# Altium PCB Glove_End.PcbDoc
Units mm, origin at the board's own origin, x right, y up, seen from the top; angles counter-clockwise.
Board outline 50.1 x 61.38 mm, 2 copper layers (Top Layer, Bottom Layer); 63 components, 108 nets, 559 pads, 133 vias.
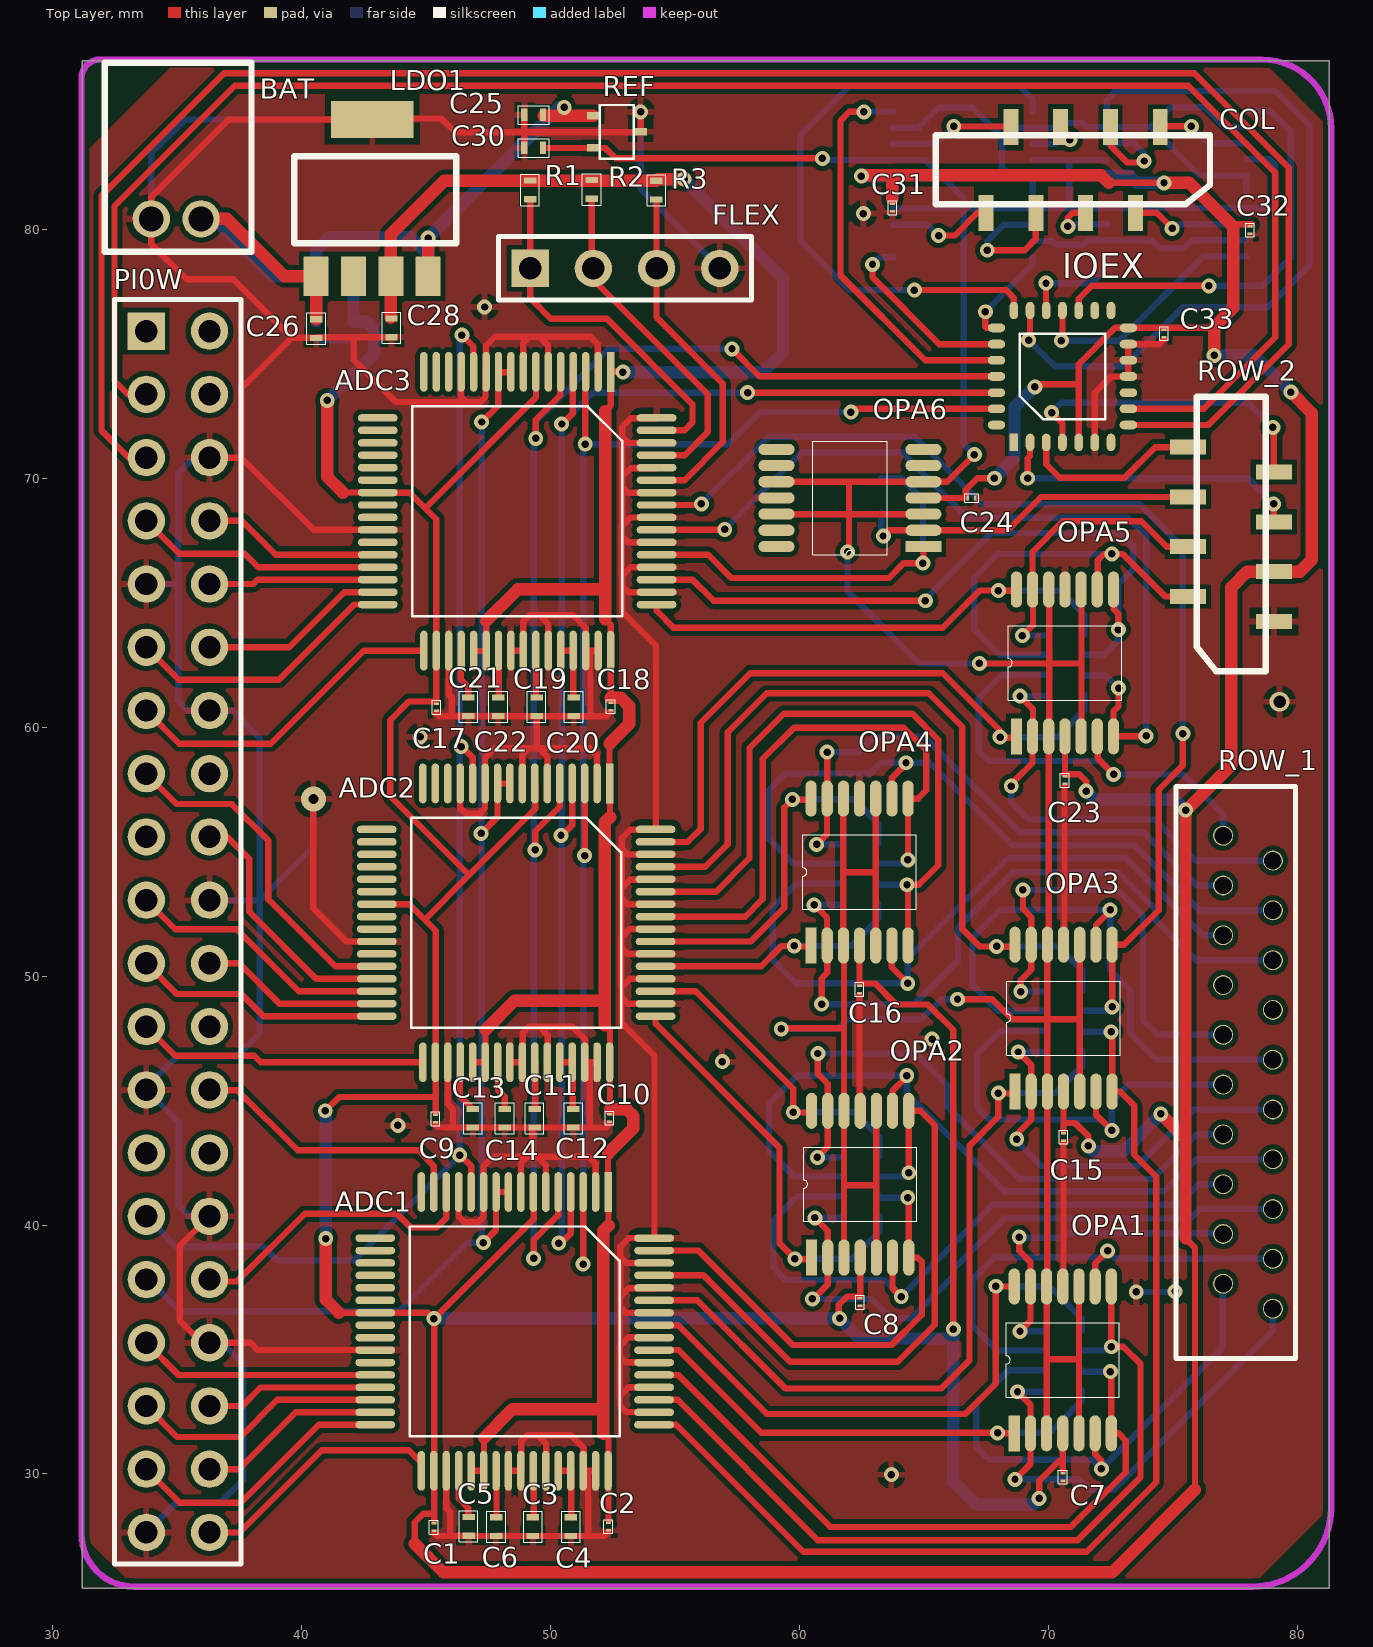
[diagram p0: Top Layer view]
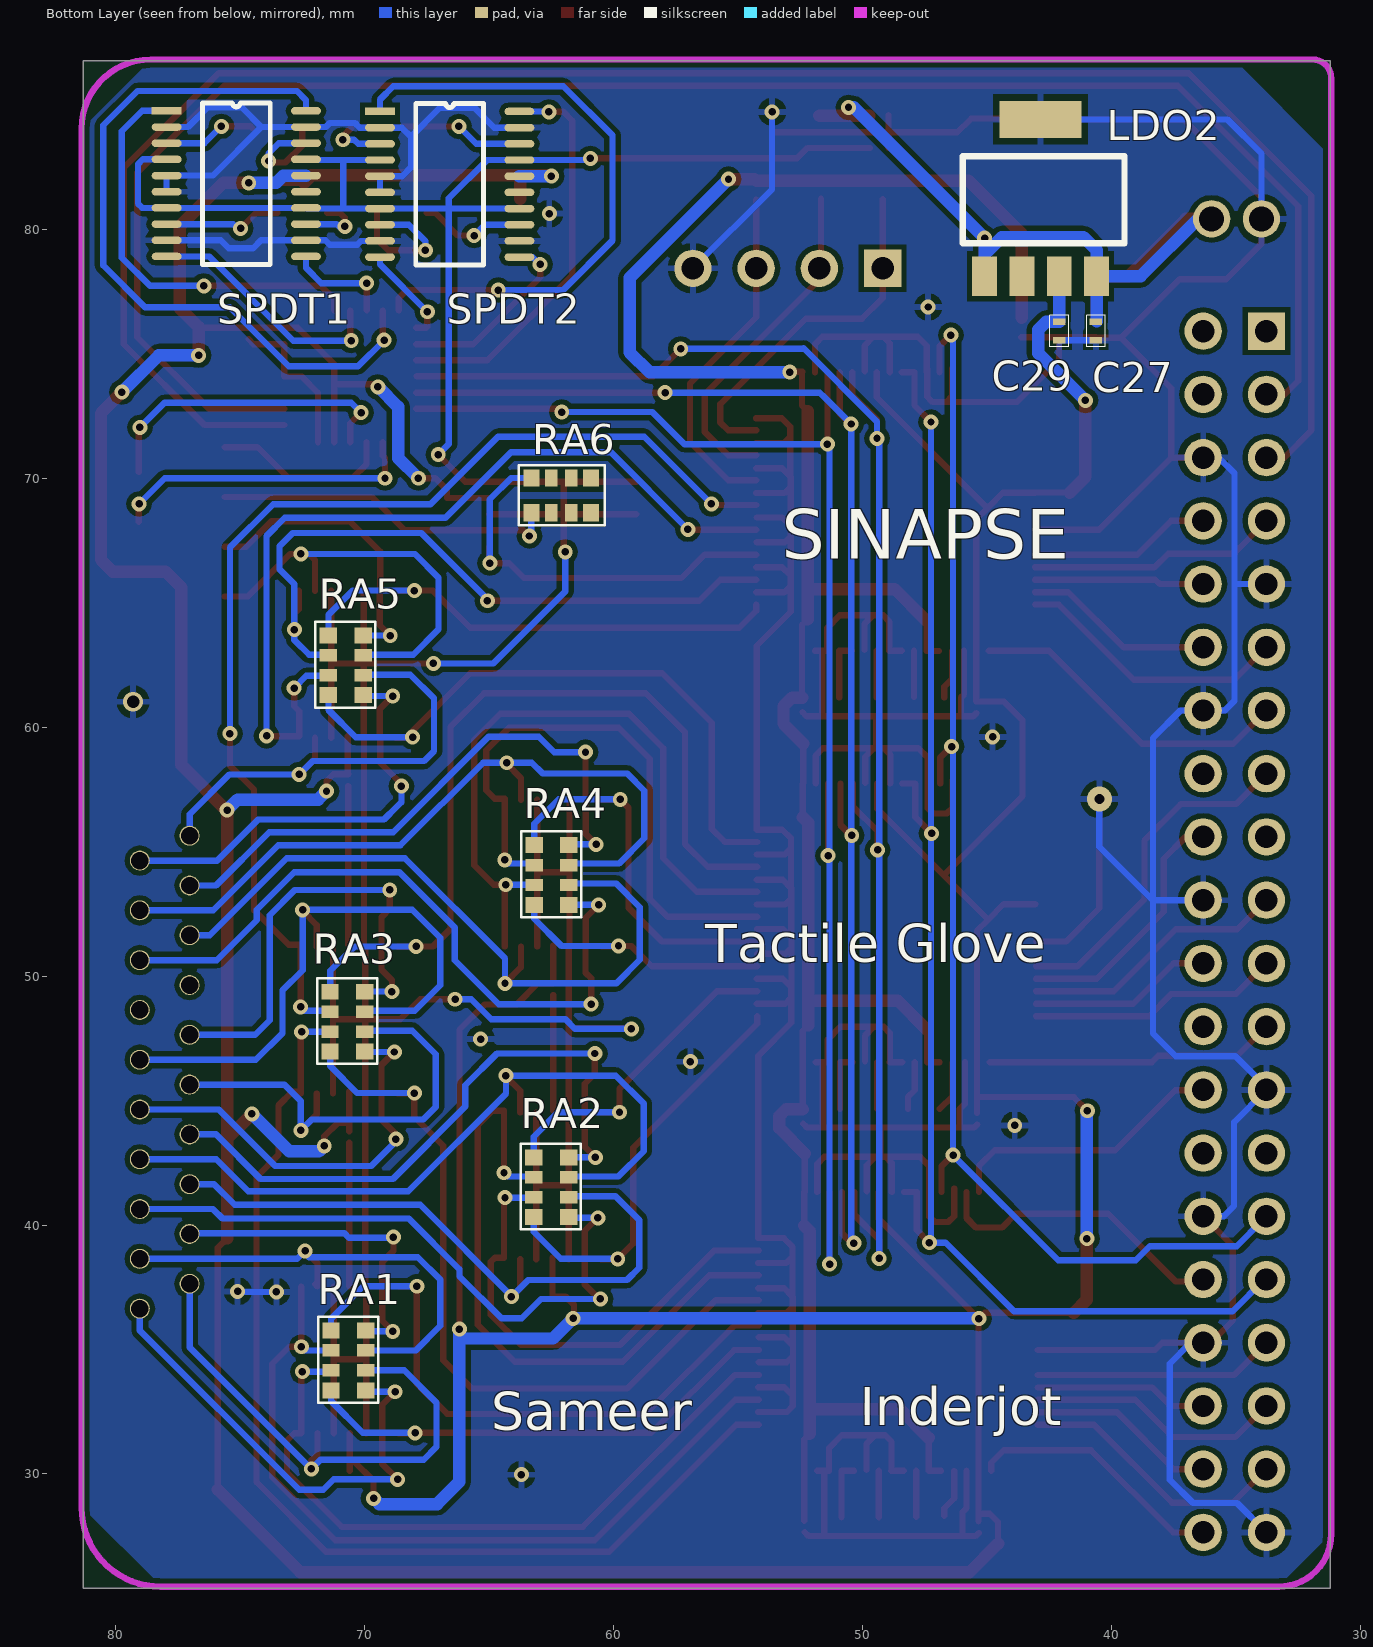
[diagram p1: Bottom Layer view, seen from below]

## Layer stack, top to bottom
Top Solder: solder mask 0.0102, Solder Resist, Dk 3.5
Top Layer: signal copper 0.0356
Dielectric 1: dielectric 0.32, FR-4, Dk 4.8
Bottom Layer: signal copper 0.0356
Bottom Solder: solder mask 0.0102, Solder Resist, Dk 3.5

## Board outline
31.19,25.4 81.29,25.4 81.29,86.78 31.19,86.78

## Design rules (kind name [scope] priority, off if disabled: settings)
Clearance [All] p1: gap=0.2 except(0.1: SMDPad-THPad SMDPad-SMDPad THPad-THPad)
HoleSize [All] p1: absolutevalues=TRUE maxlimit=5 minlimit=0.3 maxpercent=80.000 minpercent=20.000
HoleToHoleClearance [All] p1: gap=0.2 allowstackedmicrovias=TRUE
MinimumSolderMaskSliver [All] p1: minsoldermaskwidth=0.1
PolygonConnect [All] p1: connectstyle=Relief reliefconductorwidth=0.254 reliefentries=4 polygonreliefangle="90 Angle" airgapwidth=0.254
RoutingVias [All] p1: holewidth=0.3 width=0.6 viastyle="Through Hole" minholewidth=0.3 minwidth=0.6 maxholewidth=1 maxwidth=2
SilkToSilkClearance [All] p1: silktosilkclearance=0
SilkToSolderMaskClearance [IsPad] p1: minsilkscreentomaskgap=0 clearancetoexposedcopper=TRUE
SolderMaskExpansion [All] p1: expansion=0.05
UnpouredPolygon [All] p1: allowunpoured=FALSE
Width [All] p1: maxlimit=0.6 minlimit=0.2 preferedwidth=0.2
24 further rules are at their usual default settings.

## Components (designator, comment, footprint, x,y, rotation, side; value= is the part's Value field where it differs from the comment)
ADC1 "ADS8588s" LQFP64 52.31,41.325 r270 top
ADC2 "ADS8588s" LQFP64 52.37,57.74 r270 top
ADC3 "ADS8588s" LQFP64 52.41,74.275 r270 top
BAT "Battery" JST_CONN_2POS 33.96,80.42 r0 top (schematic designator HEADER1)
C1 "Cap" 0402 45.31,27.86 r270 top
C2 "Cap" 0402 52.32,27.89 r270 top
C3 "Cap" 1005 49.29,27.88 r90 top
C4 "Cap" 1005 50.82,27.88 r270 top
C5 "Cap" 1005 46.71,27.89 r270 top
C6 "Cap" 1005 47.82,27.88 r270 top
C7 "Cap" 0402 70.58,29.88 r90 top
C8 "Cap" 0402 62.43,36.9 r90 top
C9 "Cap" 0402 45.38,44.27 r270 top
C10 "Cap" 0402 52.37,44.3 r270 top
C11 "Cap" 1005 49.36,44.29 r90 top
C12 "Cap" 1005 50.92,44.29 r270 top
C13 "Cap" 1005 46.88,44.29 r270 top
C14 "Cap" 1005 48.16,44.29 r270 top
C15 "Cap" 0402 70.61,43.54 r90 top
C16 "Cap" 0402 62.41,49.47 r90 top
C17 "Cap" 0402 45.42,60.8 r270 top
C18 "Cap" 0402 52.42,60.83 r270 top
C19 "Cap" 1005 49.44,60.82 r90 top
C20 "Cap" 1005 50.93,60.82 r270 top
C21 "Cap" 1005 46.7,60.82 r270 top
C22 "Cap" 1005 47.9,60.82 r270 top
C23 "Cap" 0402 70.66,57.87 r90 top
C24 "Cap" 0402 66.92,69.21 r180 top
C25 "Cap" 1005 49.32,84.595 r0 top
C26 "Cap" 1005 40.585,76.015 r90 top
C27 "Cap" 1005 40.61,75.915 r90 bottom
C28 "Cap" 1005 43.61,76.04 r90 top
C29 "Cap" 1005 42.085,75.915 r90 bottom
C30 "Cap" 1005 49.32,83.27 r0 top
C31 "Cap" 0402 63.735,80.87 r90 top
C32 "Cap" 0402 78.095,79.97 r90 top
C33 "Cap" 0402 74.65,75.81 r90 top
COL "FFC_8POS" FFC_SMD_8_1 74.495,84.11 r180 top (schematic designator COL_CON1)
FLEX "HEADER4x1" HDR1X4 49.179,78.435 r0 top (schematic designator FLEX_CON1)
IOEX "MCP23017" QFN28 68.615,71.44 r90 top (schematic designator IOEX1)
LDO1 "LP38693-5" SOT-223(5) 40.585,78.115 r0 top
LDO2 "LP38693-3.3" SOT-223(5) 45.085,78.115 r180 bottom
OPA1 "OPA4354" TSSOP14 68.63,31.63 r90 top
OPA2 "OPA4354" TSSOP14 60.49,38.69 r90 top
OPA3 "OPA4354" TSSOP14 68.66,45.36 r90 top
OPA4 "OPA4354" TSSOP14 60.465,51.23 r90 top
OPA5 "OPA4354" TSSOP14 68.715,59.63 r90 top
OPA6 "OPA4354" TSSOP14 64.98,67.26 r180 top
PI0W "Header 20X2" HDR2X20 33.76,75.91 r270 top (schematic designator PI_CONN1)
R1 "Res3" 1005 49.18,81.582 r270 top
R2 "Res3" 1005 51.655,81.602 r270 top
R3 "Res3" 1005 54.255,81.577 r270 top
RA1 "RES_ARR_4" 4x0603(0612) 69.94,33.36 r90 bottom
RA2 "RES_ARR_4" 4x0603(0612) 61.79,40.32 r90 bottom
RA3 "RES_ARR_4" 4x0603(0612) 69.98,46.97 r90 bottom
RA4 "RES_ARR_4" 4x0603(0612) 61.78,52.86 r90 bottom
RA5 "RES_ARR_4" 4x0603(0612) 70.05,61.29 r90 bottom
RA6 "RES_ARR_4" 4x0603(0612) 63.29,68.61 r180 bottom
REF "REF3312-1.2V" SC70(3) 51.72,84.57 r270 top (schematic designator REF1)
ROW_1 "FFC_20POS" FFC_THT_20_1 79.02,36.64 r90 top (schematic designator ROW_CON1)
ROW_2 "FFC_8POS" FFC_SMD_8_1 79.06,64.25 r90 top (schematic designator ROW_CON2)
SPDT1 "ADG734" TSSOP20 77.945,84.76 r180 bottom
SPDT2 "ADG734" TSSOP20 69.37,84.735 r180 bottom

## Footprints (in the part's own frame and the unit in brackets; to place one, negate y for a bottom-side part, rotate by r counter-clockwise, add the part's x,y. Pads: shape width x height; smd on the part's side, far side on the other; paste and mask are expansions set on the pad)
4x0603(0612) [mm]
  rect 0.64x0.7 smd mask+0.05: 1(0,0) 4(2.4,0) 5(2.4,1.4) 8(0,1.4)
  rect 0.5x0.7 smd mask+0.05: 2(0.8,0) 3(1.6,0) 6(1.6,1.4) 7(0.8,1.4)
  silkscreen extent -0.5,-0.49 2.95,1.92
0402 [mm]
  rect 0.1x0.2 smd mask+0.05: 1(-0.15,0) 2(0.15,0)
  silkscreen extent -0.28,-0.18 0.28,0.18
1005 [mm]
  rect 0.25x0.5 smd: 1(-0.375,0) 2(0.375,0)
  silkscreen extent -0.63,-0.38 0.63,0.38
FFC_SMD_8_1 [mm]
  rect 0.6x1.45 smd: 1(0,0) 2(1,3.45) 3(2,0) 4(3,3.45) 5(4,0) 6(5,3.45) 7(6,0) 8(7,3.45)
  silkscreen extent -2,0.33 9.03,3.1
FFC_THT_20_1 [mm]
  round 0.8 hole 0.7 mask+0.2: 1(0,0) 2(1,2) 3(2,0) 4(3,2) 5(4,0) 6(5,2) 7(6,0) 8(7,2) 9(8,0) 10(9,2) 11(10,0) 12(11,2) 13(12,0) 14(13,2) 15(14,0) 16(15,2) 17(16,0) 18(17,2) 19(18,0) 20(19,2)
  silkscreen extent -2,-0.9 20.98,3.9
HDR1X4 [mm] "Connector; Header; 4 Position"
  rect 1.5x1.5 hole 0.9: 1(0,0)
  round 1.5 hole 0.9: 2(2.54,0) 3(5.08,0) 4(7.62,0)
  silkscreen extent -1.27,-1.27 8.89,1.27
HDR2X20 [mm] "Connector; Header; 20x2 Position"
  rect 1.5x1.5 hole 0.9: 1(0,0)
  round 1.5 hole 0.9: 2(0,2.54) 3(2.54,0) 4(2.54,2.54) 5(5.08,0) 6(5.08,2.54) 7(7.62,0) 8(7.62,2.54) 9(10.16,0) 10(10.16,2.54) 11(12.7,0) 12(12.7,2.54) 13(15.24,0) 14(15.24,2.54) 15(17.78,0) 16(17.78,2.54) 17(20.32,0) 18(20.32,2.54) 19(22.86,0) 20(22.86,2.54) 21(25.4,0) 22(25.4,2.54) 23(27.94,0) 24(27.94,2.54) 25(30.48,0) 26(30.48,2.54) 27(33.02,0) 28(33.02,2.54) 29(35.56,0) 30(35.56,2.54) 31(38.1,0) 32(38.1,2.54) 33(40.64,0) 34(40.64,2.54) 35(43.18,0) 36(43.18,2.54) 37(45.72,0) 38(45.72,2.54) 39(48.26,0) 40(48.26,2.54)
  silkscreen extent -1.27,-1.27 49.53,3.81
JST_CONN_2POS [mm]
  round 1.5 hole 1: 1(0,0) 2(2,0)
  silkscreen extent -1.88,-1.33 4.02,6.27
LQFP64 [mm]
  rect 1.6x0.3 smd mask+0.05: 1(0,0)
  oval 1.6x0.3 smd mask+0.05: 2(0,-0.5) 3(0,-1) 4(0,-1.5) 5(0,-2) 6(0,-2.5) 7(0,-3) 8(0,-3.5) 9(0,-4) 10(0,-4.5) 11(0,-5) 12(0,-5.5) 13(0,-6) 14(0,-6.5) 15(0,-7) 16(0,-7.5) 33(11.2,-7.5) 34(11.2,-7) 35(11.2,-6.5) 36(11.2,-6) 37(11.2,-5.5) 38(11.2,-5) 39(11.2,-4.5) 40(11.2,-4) 41(11.2,-3.5) 42(11.2,-3) 43(11.2,-2.5) 44(11.2,-2) 45(11.2,-1.5) 46(11.2,-1) 47(11.2,-0.5) 48(11.2,0)
  oval 0.3x1.6 smd mask+0.05: 17(1.85,-9.35) 18(2.35,-9.35) 19(2.85,-9.35) 20(3.35,-9.35) 21(3.85,-9.35) 22(4.35,-9.35) 23(4.85,-9.35) 24(5.35,-9.35) 25(5.85,-9.35) 26(6.35,-9.35) 27(6.85,-9.35) 28(7.35,-9.35) 29(7.85,-9.35) 30(8.35,-9.35) 31(8.85,-9.35) 32(9.35,-9.35) 49(9.35,1.85) 50(8.85,1.85) 51(8.35,1.85) 52(7.85,1.85) 53(7.35,1.85) 54(6.85,1.85) 55(6.35,1.85) 56(5.85,1.85) 57(5.35,1.85) 58(4.85,1.85) 59(4.35,1.85) 60(3.85,1.85) 61(3.35,1.85) 62(2.85,1.85) 63(2.35,1.85) 64(1.85,1.85)
  silkscreen extent 1.38,-7.96 9.81,0.47
QFN28 [mm]
  rect 0.7x0.35 smd mask+0.05: 1(0,0)
  oval 0.7x0.35 smd mask+0.05: 2(0,-0.65) 3(0,-1.3) 4(0,-1.95) 5(0,-2.6) 6(0,-3.25) 7(0,-3.9) 15(5.3,-3.9) 16(5.3,-3.25) 17(5.3,-2.6) 18(5.3,-1.95) 19(5.3,-1.3) 20(5.3,-0.65) 21(5.3,0)
  oval 0.35x0.7 smd mask+0.05: 8(0.7,-4.6) 9(1.35,-4.6) 10(2,-4.6) 11(2.65,-4.6) 12(3.3,-4.6) 13(3.95,-4.6) 14(4.6,-4.6) 22(4.6,0.7) 23(3.95,0.7) 24(3.3,0.7) 25(2.65,0.7) 26(2,0.7) 27(1.35,0.7) 28(0.7,0.7)
  silkscreen extent 0.93,-3.67 4.37,-0.23
SC70(3) [mm]
  rect 0.3x0.5 smd mask+0.1: 1(0,0) 2(1.3,0) 3(0.65,1.9)
  silkscreen extent -0.42,0.25 1.73,1.62
SOT-223(5) [mm]
  rect 1x1.6 smd: 1(0,0) 2(1.5,0) 3(3,0) 4(4.5,0)
  rect 3.3x1.5 smd: 5(2.25,6.3)
  silkscreen extent -0.87,1.33 5.63,4.83
TSSOP14 [mm]
  rect 1.45x0.45 smd mask+0.05: 1(0,0)
  oval 1.45x0.45 smd mask+0.05: 2(0,-0.65) 3(0,-1.3) 4(0,-1.95) 5(0,-2.6) 6(0,-3.25) 7(0,-3.9) 8(5.9,-3.9) 9(5.9,-3.25) 10(5.9,-2.6) 11(5.9,-1.95) 12(5.9,-1.3) 13(5.9,-0.65) 14(5.9,0)
  silkscreen extent 1.46,-4.23 4.44,0.33
TSSOP20 [mm]
  rect 1.2x0.3 smd: 1(0,0)
  oval 1.2x0.3 smd: 2(0,-0.65) 3(0,-1.3) 4(0,-1.95) 5(0,-2.6) 6(0,-3.25) 7(0,-3.9) 8(0,-4.55) 9(0,-5.2) 10(0,-5.85) 11(5.6,-5.85) 12(5.6,-5.2) 13(5.6,-4.55) 14(5.6,-3.9) 15(5.6,-3.25) 16(5.6,-2.6) 17(5.6,-1.95) 18(5.6,-1.3) 19(5.6,-0.65) 20(5.6,0)
  silkscreen extent 1.43,-6.18 4.17,0.33

## Part data
BAT: library part "Header 2", "Header, 2-Pin"
C1 C2 C3 C4 C5 C6 C7 C8 C9 C10 C11 C12 C13 C14 C15 C16 C17 C18 C19 C20 C21 C22 C23 C24 C25 C26 C27 C28 C29 C30 C31 C32 C33: "Capacitor"
COL ROW_2: library part FFC_8POPS
FLEX: library part "Header 4", "Header, 4-Pin"
LDO1 LDO2: library part LP38693
PI0W: "Header, 20-Pin, Dual row"
R1 R2 R3: "Resistor"
REF: library part REF3312

## Via types
v1: diameter 0.6, hole 0.3, Top Layer to Bottom Layer, 131 vias
v2: diameter 0.8, hole 0.5, Top Layer to Bottom Layer, 1 vias
v3: diameter 1, hole 0.4, Top Layer to Bottom Layer, 1 vias

## Nets (pads, with @x,y where several pads share a name; then routed paths per layer and width w, separated by ;. In a path a pad name is that pad's centre, name@x,y a point inside that pad or via, vN(x,y) a via of type N, cw(c..) or ccw(c..) an arc to the next point about the centre after c; other vN are vias at no path point)
3V3: ADC1.7 ADC1.23 ADC1.34 ADC2.7 ADC2.23 ADC2.34 ADC3.7 ADC3.23 ADC3.34 C1.1 C7.2 C8.2 C9.1 C15.2 C16.2 C17.1 C23.2 C24.2 C29.2 C31.2 C32.2 C33.2 IOEX.5 IOEX.14 LDO2.3 OPA1.4 OPA2.4 OPA3.4 OPA4.4 OPA5.4 OPA6.4 ROW_2.3 SPDT1.16 SPDT2.16 | length 291.5
  Top Layer w0.254: v1(40.95,44.59) 41.5,45.14 45.39,45.14 ; 41.495,36.475 ADC1.23 ; 41.655,69.425 ADC3.23 ; ADC1.23@42.98,36.475 45.075,36.475 ; ADC2.23@43.04,52.885 44.325,52.885 44.94,52.27 ; ADC3.23@43.065,69.415 44.35,69.415 44.965,68.8 ; 44.54,27.2 44.54,28.06 44.88,28.4 45.29,28.4 ; v1@45.32,36.23 49.33,40.24 ADC1.7@49.33,41.325 ; 45.33,28.09 v1@45.33,36.22 ; 45.39,44.5 45.39,45.14 ; 46.71,54.06 46.71,54.07 43.56,57.22 43.56,60.28 44.31,61.03 45.415,61.03 45.415,68.35 44.965,68.8 ; ADC2.7@49.39,57.735 49.39,56.72 46.72,54.05 44.94,52.27 ; ADC3.7@49.415,74.265 49.415,73.25 44.965,68.8 ; v1(61.61,36.25) 61.61,36.44 61.58,36.47 61.58,36.79 61.92,37.13 62.44,37.13 OPA2.4 ; OPA4.4 62.415,49.705 63.035,49.705 63.88,48.86 65.16,48.86 66.18,47.84 v1(66.18,35.82) ; v1(62.485,82.135) v1@62.52,82.17 ; OPA6.4 66.68,69.21 66.68,69.54 67.14,70 v1(67.83,70) ; v1(69.46,73.67) 69.57,73.78 71.215,73.78 ; v1(69.63,29.02) 69.63,29.72 70.42,30.51 70.58,30.51 ; 70.58,30.13 70.58,30.51 ; OPA1.4 70.58,30.51 ; 70.61,43.77 OPA3.4 ; 70.64,58.105 71.245,58.105 71.52,57.83 v1(71.52,57.43) ; 70.665,58.105 OPA5.4 ; 70.68,44.1 71.07,44.1 71.61,43.56 v1(71.61,43.18) ; IOEX.5 71.215,73.78 ; 72.425,81.87 v1(74.645,81.87) ; 75.51,39.46 75.89,39.08 75.89,29.37 ; 76.68,76.04 IOEX.14 72.675,76.04 71.215,74.58 71.215,73.78 ; 77.42,80.2 78.18,80.2 ; 44.94,52.27 45.39,51.82 45.39,45.14
  Top Layer w0.5: v1(40.97,39.45) 40.97,37 41.495,36.475 ; v1(41.03,73.13) 41.03,70.05 41.655,69.425 ; 44.54,27.2 45.69,26.05 72.57,26.05 75.89,29.37 ; v1@62.52,82.17 72.125,82.17 72.425,81.87 ; 63.735,81.22 63.735,82.17 ; v1(74.515,44.465) 75.51,43.47 ; v1(74.645,81.87) 75.67,81.87 77.42,80.12 77.42,76.84 76.66,76.08 v1(76.66,74.94) ; 75.51,39.46 75.51,56.64 77.35,58.48 77.35,65.62 77.98,66.25 ROW_2.3 80.11,66.25 80.58,66.72 80.58,72.62 v1(79.74,73.46)
  Bottom Layer w0.25: 66.18,35.44 v1(66.18,35.82)
  Bottom Layer w0.5: v1(40.95,44.59) 40.94,44.58 40.97,44.55 v1(40.97,39.45) ; v1(41.03,73.13) 42.92,75.02 42.92,75.97 42.6,76.29 C29.2 LDO2.3 ; v1(45.31,36.24) 45.32,36.25 v1(61.61,36.25) 62.42,35.44 66.18,35.44 ; v1(62.485,82.135) SPDT2.16 ; v1(66.18,35.82) 66.18,29.69 67.08,28.79 69.4,28.79 v1(69.63,29.02) ; v1(67.83,70) 68.64,70.81 68.64,72.87 69.44,73.67 v1(69.46,73.67) ; v1(71.52,57.43) 71.86,57.09 75.09,57.09 v1(75.51,56.67) ; v1(71.61,43.18) 71.83,42.96 73.01,42.96 v1(74.515,44.465) ; SPDT1.16 73.255,82.16 73.545,81.87 v1(74.645,81.87) ; v1(76.66,74.94) 78.26,74.94 v1(79.74,73.46)
5V0: ADC1.1 ADC1.37 ADC1.38 ADC1.48 ADC2.1 ADC2.37 ADC2.38 ADC2.48 ADC3.1 ADC3.37 ADC3.38 ADC3.48 C2.1 C10.1 C18.1 C28.2 LDO1.3 R1.1 R2.1 R3.1 | length 102
  Top Layer w0.25: ADC1.37@46.83,30.125 47.33,30.125 47.33,31.45 ; ADC2.37@46.89,46.535 47.39,46.535 47.39,47.84 ; ADC3.37@46.915,63.065 47.415,63.065 47.415,64.265 ; 52.11,31.61 52.33,31.39 52.33,28.12 ; 52.17,48.02 52.39,47.8 52.39,44.53 ; 52.195,64.335 52.415,64.115 52.415,61.19 ; 52.195,72.7 52.415,72.92 ADC3.1@52.415,74.265 ; ADC1.1 52.31,42.87 ; 52.33,39.98 ADC1.1@52.33,41.325 ; ADC2.1 52.37,59.34 ; 52.39,56.39 ADC2.1@52.39,57.735 ; ADC3.1 v1@52.895,74.275
  Top Layer w0.5: C28.2@43.585,76.44 LDO1.3 43.585,79.805 45.737,81.957 R1.1 ; 47.33,31.45 48.48,32.6 52.11,32.6 ; 47.39,47.84 48.56,49.01 52.17,49.01 ; 47.415,64.265 48.69,65.54 52.195,65.54 ; R1.1@49.18,81.952 R3.1 54.323,82.02 v1(55.37,82.02) ; 52.11,31.61 52.11,39.76 52.33,39.98 ; 52.17,48.02 52.17,56.17 52.39,56.39 ; 52.195,64.335 52.195,72.7 ; 52.31,42.87 53.33,43.89 53.33,44.38 53.06,44.65 52.39,44.65 ; 52.37,59.34 53.16,60.13 53.16,60.85 52.82,61.19 52.415,61.19 ; v1@52.895,74.275 v1(52.91,74.26)
  Bottom Layer w0.5: v1(52.91,74.26) 58.54,74.26 59.34,75.06 59.34,78.05 v1(55.37,82.02)
A1: ADC1.53 OPA1.7 RA1.7 | length 28
  Top Layer w0.254: ADC1.53 55.125,33.975 61.23,27.87 70.91,27.87 73.11,30.07 73.11,31.34 72.82,31.63 OPA1.7 72.53,34.07 v1(72.49,34.11)
  Bottom Layer w0.254: RA1.7 71.39,34.11 v1(72.49,34.11)
A2: ADC1.57 OPA1.14 RA1.5 | length 24.8
  Top Layer w0.254: ADC1.57 55.125,35.975 58.69,32.41 66.67,32.41 67.89,33.63 v1(67.89,37.54) 67.9,37.53 OPA1.14
  Bottom Layer w0.254: v1(67.89,37.54) 70.04,37.54 71.34,36.24 RA1.5
A3: ADC1.63 OPA2.7 RA2.7 | length 19.2
  Top Layer w0.254: ADC1.63 55.937,38.975 59.732,35.18 63.7,35.18 64.92,36.4 64.92,38.52 64.75,38.69 OPA2.7 64.39,41.06 v1(64.35,41.1)
  Bottom Layer w0.254: RA2.7@63.2,41.15 63.25,41.1 v1(64.35,41.1)
A4: ADC2.49 OPA2.1 RA2.8 | length 17.2
  Top Layer w0.254: ADC2.49 54.22,48.08 59.2,43.1 59.2,39.26 v1(59.82,38.64) 59.84,38.62 OPA2.1@60.49,38.62
  Bottom Layer w0.254: v1(59.82,38.64) 62.11,38.64 63.2,39.73 RA2.8@63.2,40.35
A5: ADC1.51 OPA1.8 RA1.6 | length 32.6
  Top Layer w0.254: ADC1.51 55.105,32.975 60.74,27.34 71.17,27.34 73.7,29.87 73.7,34.42 73.01,35.11 v1(72.53,35.11) OPA1.8
  Bottom Layer w0.254: RA1.6 72.38,34.96 v1(72.53,35.11)
A6: ADC1.55 OPA1.1 RA1.8 | length 20.2
  Top Layer w0.254: ADC1.55 55.145,34.975 58.47,31.65 v1(67.96,31.65) 67.98,31.63 OPA1.1
  Bottom Layer w0.254: v1(67.96,31.65) 70.06,31.65 71.34,32.93 RA1.8
A7: ADC1.59 OPA3.1 RA3.8 | length 31
  Top Layer w0.254: ADC1.59 55.895,36.975 59.44,33.43 65.69,33.43 66.83,34.57 66.83,43.19 67.99,44.35 v1(67.99,45.3) 68.01,45.28 OPA3.1@68.66,45.28
  Bottom Layer w0.254: v1(67.99,45.3) 70.28,45.3 71.37,46.39 RA3.8@71.37,47.01
A8: ADC2.51 OPA2.14 RA2.5 | length 13.5
  Top Layer w0.254: ADC2.51 55.831,49.39 59.75,45.472 v1(59.75,44.53) 59.76,44.52 OPA2.14@60.49,44.52
  Bottom Layer w0.254: v1(59.75,44.53) 62.22,44.53 63.2,43.55 RA2.5@63.2,42.75
A9: ADC1.61 OPA2.8 RA2.6 | length 26.3
  Top Layer w0.254: ADC1.61 56.145,37.975 59.62,34.5 63.95,34.5 65.44,35.99 65.44,44.01 64.86,44.59 OPA2.8 ; v1(64.39,42.1) OPA2.8@64.39,44.52
  Bottom Layer w0.254: RA2.6@63.2,41.95 64.24,41.95 v1(64.39,42.1)
A10: ADC2.61 OPA3.14 RA3.5 | length 33.6
  Top Layer w0.254: ADC2.61 56.21,54.39 57.12,55.3 57.12,59.79 58.69,61.36 65.19,61.36 66.54,60.01 66.54,51.89 67.24,51.19 v1(67.92,51.19) 67.93,51.18 OPA3.14@68.66,51.18
  Bottom Layer w0.254: v1(67.92,51.19) 70.39,51.19 71.37,50.21 RA3.5@71.37,49.41
A11: ADC3.57 OPA3.8 RA3.6 | length 45.1
  Top Layer w0.254: ADC3.57 v1@56.015,68.925 ; v1(72.56,48.76) OPA3.8@72.56,51.18 ; OPA3.8 73.04,51.26 74.43,52.65 74.43,57.49 75.4,58.46 v1(75.4,59.74)
  Bottom Layer w0.254: v1(56.06,68.97) 58.76,71.67 64.63,71.67 67.34,68.96 73.66,68.96 75.4,67.22 v1(75.4,59.74) ; RA3.6@71.37,48.61 72.41,48.61 v1(72.56,48.76)
A12: ADC1.49 OPA3.7 RA3.7 | length 43.7
  Top Layer w0.254: ADC1.49 55.055,31.975 60.16,26.87 71.54,26.87 74.33,29.66 74.33,41.94 73.45,42.82 73.45,44.8 72.89,45.36 OPA3.7 ; v1(72.52,47.76) 72.56,47.72 OPA3.7@72.56,45.28
  Bottom Layer w0.254: RA3.7@71.37,47.81 71.42,47.76 v1(72.52,47.76)
A13: ADC2.63 OPA5.1 RA5.8 | length 25.5
  Top Layer w0.254: ADC2.63 55.52,55.39 56.04,55.91 56.04,60.18 58.03,62.17 65.75,62.17 68.06,59.86 v1(68.06,59.6) 68.08,59.58 OPA5.1@68.73,59.58
  Bottom Layer w0.254: v1(68.06,59.6) 70.35,59.6 71.44,60.69 RA5.8@71.44,61.31
A14: ADC2.57 OPA4.8 RA4.6 | length 23.8
  Top Layer w0.254: ADC2.57 57.82,52.39 58.53,53.1 58.53,58.73 59.78,59.98 64.19,59.98 65.1,59.07 65.1,57.47 64.76,57.13 OPA4.8 ; v1(64.36,54.67) OPA4.8@64.36,57.09
  Bottom Layer w0.254: RA4.6@63.17,54.52 64.21,54.52 v1(64.36,54.67)
A15: ADC2.53 OPA4.1 RA4.8 | length 11
  Top Layer w0.254: ADC2.53 58.46,50.39 59.28,51.21 v1(59.79,51.21) 59.81,51.19 OPA4.1@60.46,51.19
  Bottom Layer w0.254: v1(59.79,51.21) 62.08,51.21 63.17,52.3 RA4.8@63.17,52.92
A16: ADC2.59 OPA4.7 RA4.7 | length 27.6
  Top Layer w0.254: ADC2.59 56.65,53.39 57.99,54.73 57.99,59.16 59.37,60.54 64.54,60.54 65.58,59.5 65.58,54.45 64.8,53.67 v1(64.32,53.67) 64.36,53.63 OPA4.7@64.36,51.19
  Bottom Layer w0.254: RA4.7@63.17,53.72 63.22,53.67 v1(64.32,53.67)
A17: ADC2.55 OPA4.14 RA4.5 | length 15.6
  Top Layer w0.254: ADC2.55 58.04,51.39 59.39,52.74 59.39,56.77 v1(59.72,57.1) 59.73,57.09 OPA4.14@60.46,57.09
  Bottom Layer w0.254: v1(59.72,57.1) 62.19,57.1 63.17,56.12 RA4.5@63.17,55.32
A18: ADC3.55 OPA5.7 RA5.7 | length 35.3
  Top Layer w0.254: ADC3.55 v1@56.975,67.925 ; v1(72.82,61.57) 72.82,60.84 72.615,60.635 OPA5.7 73.91,59.63 v1(73.93,59.65)
  Bottom Layer w0.254: v1(57,67.95) 60.09,71.04 64.11,71.04 66.74,68.41 73.2,68.41 73.93,67.68 v1(73.93,59.65) ; RA5.7@71.44,62.11 71.49,62.06 72.33,62.06 v1(72.82,61.57)
A19: ADC3.53 OPA6.1 RA6.8 | length 16.6
  Top Layer w0.254: ADC3.53 56.335,66.925 57.27,65.99 63.58,65.99 64.18,66.59 v1(64.96,66.59) 64.98,66.61 OPA6.1
  Bottom Layer w0.254: RA6.8 64.1,70.01 64.96,69.15 v1(64.96,66.59)
A20: ADC3.49 OPA5.14 RA5.5 | length 20.3
  Top Layer w0.254: ADC3.49 54.26,64.67 54.94,63.99 65.75,63.99 67.25,65.49 v1(67.99,65.49) 68,65.48 OPA5.14@68.73,65.48
  Bottom Layer w0.254: v1(67.99,65.49) 70.46,65.49 71.44,64.51 RA5.5@71.44,63.71
A21: ADC3.51 OPA5.8 RA5.6 | length 28.3
  Top Layer w0.254: ADC3.51 55.705,65.925 56.55,65.08 v1(65.06,65.08) ; OPA5.8@72.63,65.48 72.63,64.74 72.81,64.56 v1(72.81,63.92)
  Bottom Layer w0.254: v1@64.95,65.04 67.71,67.8 72.88,67.8 73.41,67.27 73.41,66.35 72.81,65.75 v1(72.81,63.92) 72.81,63.5 72.22,62.91 RA5.6@71.44,62.91 ; v1@64.99,65.08 v1(65.06,65.08)
BUSY: ADC1.14 PI0W.32 | length 12.1
  Top Layer w0.254: PI0W.32@36.3,37.73 37.4,37.73 40.12,40.45 43.83,40.45 44.38,39.9 45.43,39.9 45.81,40.28 ADC1.14
C1: COL.1 SPDT1.3 | length 3.7
  Top Layer w0.254: COL.1@74.52,84.085 74.575,84.14 v1(75.745,84.14)
  Bottom Layer w0.254: v1(75.745,84.14) 76.425,83.46 SPDT1.3
C2: COL.2 SPDT1.8 | length 4.8
  Top Layer w0.254: COL.2 74.35,80.66 v1(74.97,80.04)
  Bottom Layer w0.254: v1@74.97,79.91 75.27,80.21 SPDT1.8
C3: COL.3 SPDT1.18 | length 4.4
  Top Layer w0.254: COL.3 72.495,83.36 73.17,82.685 v1@73.845,82.685
  Bottom Layer w0.254: SPDT1.18 73.435,83.46 73.845,83.05 v1(73.845,82.745)
C4: COL.4 SPDT1.13 | length 2.7
  Top Layer w0.254: v1(70.785,80.12) 70.785,80.46 70.985,80.66 COL.4
  Bottom Layer w0.254: v1(70.785,80.12) 71.03,80.12 71.12,80.21 SPDT1.13
C5: COL.5 SPDT2.3 | length 2.2
  Top Layer w0.254: COL.5 70.865,83.74 v1(70.865,83.6)
  Bottom Layer w0.254: SPDT2.3 70.25,83.435 70.415,83.6 v1(70.865,83.6)
C6: COL.6 SPDT2.8 | length 5.6
  Top Layer w0.254: v1(67.545,79.16) 69.045,79.16 69.495,79.61 COL.6
  Bottom Layer w0.254: v1(67.545,79.16) 67.545,79.52 68.21,80.185 SPDT2.8
C7: COL.7 SPDT2.18 | length 5
  Top Layer w0.254: v1(66.2,84.135) 68.47,84.135 COL.7
  Bottom Layer w0.254: SPDT2.18 65.5,83.435 v1(66.2,84.135)
C8: COL.8 SPDT2.13 | length 4.3
  Top Layer w0.254: v1(65.59,79.75) 66.24,79.75 67.15,80.66 COL.8
  Bottom Layer w0.254: SPDT2.13 65.155,80.185 v1(65.59,79.75)
CONVST: ADC1.9 ADC1.10 ADC2.9 ADC2.10 ADC3.9 ADC3.10 PI0W.31 | length 56.7
  Top Layer w0.254: v1(47.21,55.73) 47.87,56.39 ADC2.10@47.87,57.735 ; v1(47.235,72.26) 47.895,72.92 ADC3.10@47.895,74.265 ; v1(47.3,39.29) 47.81,39.8 ADC1.10 ; ADC1.10@47.83,41.325 ADC1.9 ; ADC2.10@47.89,57.735 ADC2.9@48.39,57.735 ; ADC3.10@47.915,74.265 ADC3.9@48.415,74.265
  Bottom Layer w0.254: PI0W.31@33.46,37.81 33.85,37.81 35.12,36.54 43.9,36.54 46.65,39.29 v1(47.3,39.29) ; v1@47.235,39.355 v1(47.235,72.26)
FLEX1: ADC3.63 FLEX.1 R1.2 | length 14.6
  Top Layer w0.254: FLEX.1 49.179,77.241 50.01,76.41 52.27,76.41 55.7,72.98 55.7,72.24 55.385,71.925 ADC3.63 ; FLEX.1 R1.2
FLEX2: ADC3.61 FLEX.2 R2.2 | length 14
  Top Layer w0.254: FLEX.2@51.655,78.499 R2.2 ; FLEX.2@52.095,78.435 FLEX.2 51.719,77.971 56.32,73.37 56.32,71.86 55.385,70.925 ADC3.61
FLEX3: ADC3.59 FLEX.3 R3.2 | length 14.1
  Top Layer w0.254: R3.2 54.255,76.465 56.92,73.8 56.92,71.46 55.385,69.925 ADC3.59
FRSTDATA: ADC1.15 PI0W.26 | length 11.6
  Top Layer w0.254: PI0W.26@36,45.42 37.42,45.42 39.84,43 44.68,43 45.31,42.37 ADC1.15
GND: ADC1.2 ADC1.6 ADC1.8 ADC1.11 ADC1.13 ADC1.26 ADC1.35 ADC1.40 ADC1.41 ADC1.43 ADC1.46 ADC1.47 ADC1.50 ADC1.52 ADC1.54 ADC1.56 ADC1.58 ADC1.60 ADC1.62 ADC1.64 ADC2.2 ADC2.6 ADC2.8 ADC2.11 ADC2.13 ADC2.26 ADC2.35 ADC2.40 ADC2.41 ADC2.43 ADC2.46 ADC2.47 ADC2.50 ADC2.52 ADC2.54 ADC2.56 ADC2.58 ADC2.60 ADC2.62 ADC2.64 ADC3.2 ADC3.6 ADC3.8 ADC3.11 ADC3.13 ADC3.26 ADC3.35 ADC3.40 ADC3.41 ADC3.43 ADC3.46 ADC3.47 ADC3.50 ADC3.52 ADC3.54 ADC3.56 ADC3.58 ADC3.60 ADC3.62 ADC3.64 BAT.1 C1.2 C2.2 C3.1 C4.2 C5.2 C6.2 C7.1 C8.1 C9.2 C10.2 C11.1 C12.2 C13.2 C14.2 C15.1 C16.1 C17.2 C18.2 C19.1 C20.2 C21.2 C22.2 C23.1 C24.1 C25.1 C26.1 C27.1 C28.1 C29.1 C30.1 C31.1 C32.1 C33.1 FLEX.4 IOEX.6 IOEX.11 IOEX.12 IOEX.13 LDO1.5 LDO2.5 OPA1.11 OPA2.11 OPA3.11 OPA4.11 OPA5.11 OPA6.11 PI0W.6 PI0W.9 PI0W.14 PI0W.20 PI0W.25 PI0W.30 PI0W.34 PI0W.39 REF.3 ROW_2.1 SPDT1.2 SPDT1.5 SPDT1.6 SPDT1.9 SPDT1.12 SPDT1.19 SPDT2.2 SPDT2.5 SPDT2.6 SPDT2.9 SPDT2.12 SPDT2.19 | length 392
  Top Layer w0.254: PI0W.30 35.11,39.16 35.11,36.16 36,35.27 PI0W.34 37.95,35.27 38.245,34.975 ADC1.26 ; PI0W.6 37.58,70.83 ; v3(40.47,57.11) 40.47,52.72 41.8,51.39 ADC2.26 ; C26.1 39.6,75.64 ; C26.1@40.61,75.665 42.09,75.665 ; ADC3.26 40.485,67.925 37.58,70.83 ; C28.1 42.09,75.665 ; 45.32,27.63 45.445,27.505 45.97,27.505 ; 45.38,44.04 45.505,43.915 C11.1 C12.2 51.58,43.915 ; 45.405,60.57 45.53,60.445 46.03,60.445 ; ADC1.35 45.81,28.62 45.97,28.46 45.97,27.505 ; ADC2.35 45.87,44.87 46.08,44.66 46.08,43.925 ; ADC3.35 45.91,61.31 46.03,61.19 46.03,60.445 ; ADC1.13@46.305,41.47 46.305,40.355 46.54,40.12 47.09,40.12 47.305,40.335 ADC1.11@47.305,41.47 ; ADC2.13@46.365,57.88 46.365,56.765 46.6,56.53 47.15,56.53 47.365,56.745 ADC2.11@47.365,57.88 ; ADC3.13@46.39,74.41 46.39,73.295 46.625,73.06 ; ADC1.11 47.31,42.37 47.68,42.74 49.06,42.74 ; ADC2.11 47.37,58.78 47.74,59.15 49.53,59.15 ; ADC3.11@47.39,74.41 47.39,73.275 47.175,73.06 46.625,73.06 ; ADC3.11 47.41,75.325 47.765,75.68 49.555,75.68 ; ADC1.40@48.33,30.125 ADC1.41@48.83,30.125 ; ADC2.40@48.39,46.535 ADC2.41@48.89,46.535 ; ADC3.40@48.415,63.065 ADC3.41@48.915,63.065 ; ADC1.8 48.81,42.49 49.06,42.74 ; ADC1.41@48.825,30.17 48.825,31.305 49.07,31.55 49.48,31.55 ; ADC2.8@48.87,57.735 48.87,58.9 49.03,59.06 ; ADC2.41@48.885,46.58 48.885,47.715 49.13,47.96 49.54,47.96 ; ADC3.8@48.895,74.265 48.895,75.43 49.055,75.59 ; ADC3.41@48.91,63.11 48.91,64.245 49.155,64.49 49.565,64.49 ; C30.1 48.945,83.895 ; C25.1 48.945,83.895 ; C11.1@49.265,43.82 49.265,42.74 ; 49.44,59.24 C19.1 ; ADC1.6@49.815,41.36 49.815,42.395 49.47,42.74 ; ADC1.43@49.825,30.17 49.825,31.205 49.48,31.55 ; ADC2.6@49.875,57.77 49.875,58.805 49.53,59.15 ; ADC2.43@49.885,46.58 49.885,47.615 49.54,47.96 ; ADC3.6@49.9,74.3 49.9,75.335 49.555,75.68 ; ADC3.43@49.91,63.11 49.91,64.145 49.565,64.49 ; ADC1.47 51.52,30.125 ; ADC1.2 51.81,42.45 51.52,42.74 49.47,42.74 ; ADC2.47@51.87,46.535 51.58,46.535 ; ADC2.2@51.87,57.735 51.87,58.86 51.58,59.15 49.53,59.15 ; ADC3.47@51.895,63.065 51.605,63.065 ; ADC3.2@51.895,74.265 51.895,75.39 51.605,75.68 49.555,75.68 ; 52.31,27.66 52.155,27.505 51.52,27.505 ; 52.37,44.07 52.215,43.915 51.58,43.915 ; 52.395,60.6 52.24,60.445 51.605,60.445 ; REF.3@53.595,83.895 48.945,83.895 ; REF.3 v1(53.62,84.72) ; ADC1.54@54.16,34.485 53.025,34.485 52.78,34.73 ; ADC1.56@54.16,35.485 53.125,35.485 52.79,35.15 ; ADC1.50@54.17,32.485 53.035,32.485 52.79,32.73 52.79,33.14 ; ADC1.52@54.17,33.485 53.135,33.485 52.79,33.14 ; ADC1.58@54.17,36.465 53.035,36.465 52.79,36.71 ; ADC1.60@54.17,37.465 53.135,37.465 52.8,37.13 ; ADC1.62@54.18,38.475 53.045,38.475 52.8,38.72 ; ADC2.54@54.22,50.895 53.085,50.895 52.84,51.14 ; ADC2.56@54.22,51.895 53.185,51.895 52.85,51.56 ; ADC2.50@54.23,48.895 53.095,48.895 52.85,49.14 ; ADC2.52@54.23,49.895 53.195,49.895 52.85,49.55 ; ADC2.58@54.23,52.875 53.095,52.875 52.85,53.12 ; ADC2.60@54.23,53.875 53.195,53.875 52.86,53.54 ; ADC2.62@54.24,54.885 53.105,54.885 52.86,55.13 ; ADC3.54@54.245,67.425 53.11,67.425 52.865,67.67 ; ADC3.56@54.245,68.425 53.21,68.425 52.875,68.09 ; ADC3.50@54.255,65.425 53.12,65.425 52.875,65.67 ; ADC3.52@54.255,66.425 53.22,66.425 52.875,66.08 ; ADC3.58@54.255,69.405 53.12,69.405 52.875,69.65 ; ADC3.60@54.255,70.405 53.22,70.405 52.885,70.07 ; ADC3.62@54.265,71.415 53.13,71.415 52.885,71.66 ; ADC3.64@54.265,72.415 53.23,72.415 52.885,72.07 52.885,71.66 ; OPA2.11@62.41,44.59 62.41,49.24 ; OPA1.11@70.61,37.53 70.61,43.31 ; OPA3.11@70.65,51.26 70.65,57.64 ; IOEX.6 71.865,73.44 72.515,74.09 IOEX.11 IOEX.12 IOEX.13 74.46,75.39 74.65,75.58 ; 37.58,70.83 37.58,73.62 39.6,75.64 ; 39.6,75.64 37.25,77.99 35.38,77.99 33.96,79.41 BAT.1 33.96,81.3 37.075,84.415 LDO1.5 42.87,84.45 45.62,84.45 46.175,83.895 48.945,83.895 ; 42.09,75.665 42.09,74.76 43.79,73.06 46.625,73.06 ; 45.97,27.505 51.52,27.505 ; 46.03,60.445 C19.1 ; 49.06,42.74 49.265,42.74 ; 49.265,42.74 49.47,42.74 ; C19.1 51.605,60.445 ; 49.48,31.55 50.82,31.55 51.33,31.04 51.33,30.125 51.52,30.125 ; 49.54,47.96 50.88,47.96 51.39,47.45 51.39,46.535 51.58,46.535 ; 49.565,64.49 50.905,64.49 51.415,63.98 51.415,63.065 51.605,63.065 ; 51.52,27.505 51.52,30.125 ; 51.58,43.915 51.58,46.535 ; 51.605,60.445 51.605,63.065 ; 52.78,34.73 52.78,33.15 52.79,33.14 ; 52.78,34.73 52.78,35.14 52.79,35.15 ; 52.79,35.15 52.79,36.71 ; 52.79,36.71 52.79,37.12 52.8,37.13 ; 52.8,37.13 52.8,38.72 ; 52.8,38.72 52.8,39.13 53.145,39.475 ADC1.64 54.18,39.475 54.18,46.79 52.85,48.12 52.85,49.14 ; 52.84,51.14 52.84,51.55 52.85,51.56 ; 52.84,51.14 52.84,49.56 52.85,49.55 ; 52.85,49.14 52.85,49.55 ; 52.85,51.56 52.85,53.12 ; 52.85,53.12 52.85,53.53 52.86,53.54 ; 52.86,53.54 52.86,55.13 ; 52.86,55.13 52.86,55.54 53.205,55.885 54.24,55.885 54.24,63.27 52.875,64.635 52.875,65.67 ; 52.865,67.67 52.865,66.09 52.875,66.08 ; 52.865,67.67 52.865,68.08 52.875,68.09 ; 52.875,65.67 52.875,66.08 ; 52.875,68.09 52.875,69.65 ; 52.875,69.65 52.875,70.06 52.885,70.07 ; 52.885,70.07 52.885,71.66
  Bottom Layer w0.254: PI0W.39@33.46,27.65 PI0W.39 34.94,28.83 36.71,28.83 37.65,29.77 37.65,34.43 36.81,35.27 PI0W.34@36,35.27 ; PI0W.9 35.03,65.75 ; BAT.1 33.96,83.05 35.325,84.415 LDO2.5 ; PI0W.30 35.48,40.35 35.06,40.77 35.06,44.13 PI0W.25 33.705,45.485 35,46.78 37.4,46.78 38.32,47.7 38.32,53.05 ; PI0W.20 38.32,53.05 ; PI0W.6 35.67,70.83 35.04,70.2 35.04,61.06 35.43,60.67 37.21,60.67 38.32,59.56 38.32,53.05 ; v3(40.47,57.11) 40.47,55.2 38.32,53.05 ; C27.1 C29.1 ; v1(53.62,84.72) 53.62,81.614 FLEX.4 ; SPDT2.19 64.78,84.085 65.575,84.88 66.965,84.88 68.125,83.72 ; SPDT2.9 70.13,79.535 70.285,79.38 71.395,79.38 71.575,79.56 SPDT1.12 74.15,79.56 74.47,79.24 75.45,79.24 75.77,79.56 SPDT1.9 ; SPDT2.6 SPDT2.5 68.48,82.135 68.125,82.49 68.125,83.72 ; v1(73.53,37.31) v1@75.07,37.31 ; SPDT1.6 SPDT1.5 76.085,82.16 74.135,84.11 ; SPDT1.2 77.085,84.11 76.295,84.9 74.925,84.9 74.135,84.11 ; 68.125,83.72 68.49,84.085 SPDT2.2 70.19,84.085 70.375,84.27 71.385,84.27 71.545,84.11 SPDT1.19 74.135,84.11
  other v1: 63.69,29.97 75.09,37.33 43.87,44 56.9,46.56 65.33,47.47 44.76,59.61 47.35,76.88 62.57,80.63
  other v2: 79.29,61.02
M1: OPA1.6 RA1.2 ROW_1.2 | length 21.6
  Top Layer w0.254: OPA1.6 71.88,30.79 72.13,30.54 v1(72.13,30.2)
  Bottom Layer w0.254: RA1.2 68.4,34.16 67.1,32.86 67.1,31.09 67.62,30.57 71.76,30.57 v1(72.13,30.2) 77.01,35.08 77.01,37.49 ROW_1.2@77.16,37.64
M2: OPA1.13 RA1.4 ROW_1.4 | length 13.5
  Top Layer w0.254: v1(68.83,39.51) 68.83,38.96 69.28,38.51 OPA1.13 69.28,36.15 v1(68.86,35.73) v1@68.84,35.71
  Bottom Layer w0.254: v1@68.83,39.49 70.62,39.49 70.795,39.665 ROW_1.4@77.02,39.665 ; v1@68.89,35.76 v1(68.86,35.73) RA1.4@69.91,35.73
M3: OPA2.6 RA2.2 ROW_1.6 | length 27.2
  Top Layer w0.254: OPA2.6@63.74,38.62 63.74,37.47 v1(64.09,37.12)
  Bottom Layer w0.254: RA2.2@61.8,41.15 59.91,41.15 58.96,40.2 58.96,38.28 59.45,37.79 63.42,37.79 v1(64.09,37.12) ; v1@64.09,37.14 67.76,40.81 75.21,40.81 76.04,41.64 ROW_1.6
M4: OPA2.2 RA2.1 ROW_1.5 | length 25.9
  Top Layer w0.254: v1@60.42,36.89 61.14,37.61 OPA2.2 61.14,39.77 v1(60.62,40.29) ; v1@60.52,36.99 v1(60.52,37.03)
  Bottom Layer w0.254: v1(60.52,37.03) 62.9,37.03 63.68,36.25 64.49,36.25 66.18,37.94 66.18,38.22 68.22,40.26 75.7,40.26 76.08,40.64 ROW_1.5 ; v1(60.62,40.29) RA2.1@61.74,40.29
M5: OPA1.9 RA1.3 ROW_1.3 | length 19.6
  Top Layer w0.254: OPA1.9@71.97,37.62 OPA1.9 71.88,38.46 v1(72.38,38.96)
  Bottom Layer w0.254: RA1.3 67.94,34.96 66.95,35.95 66.95,37.81 67.85,38.71 72.22,38.71 72.43,38.92 72.68,38.67 ; 72.71,38.64 ROW_1.3
M6: OPA1.2 RA1.1 ROW_1.1 | length 19.2
  Top Layer w0.254: v1(68.66,29.78) 69.28,30.4 OPA1.2 69.28,32.78 v1(68.76,33.3)
  Bottom Layer w0.254: v1(68.66,29.78) 71.23,29.78 71.65,29.36 72.62,29.36 79.02,35.76 ROW_1.1 ; v1(68.76,33.3) RA1.1@69.88,33.3
M7: OPA3.2 RA3.1 ROW_1.9 | length 16.9
  Top Layer w0.254: v1(68.73,43.45) 68.73,43.65 69.31,44.23 OPA3.2 ; v1(68.79,46.95) 69.31,46.43 OPA3.2@69.31,45.28
  Bottom Layer w0.254: v1(68.73,43.45) 68.73,43.36 69.72,42.37 73.58,42.37 75.85,44.64 ROW_1.9 ; v1(68.79,46.95) RA3.1@69.91,46.95
M8: OPA2.13 RA2.4 ROW_1.8 | length 25.2
  Top Layer w0.254: v1@60.7,42.7 v1(60.72,42.72) 61.14,43.14 OPA2.13@61.14,44.52 ; v1(60.74,46.89) 60.74,46.07 61.14,45.67 OPA2.13
  Bottom Layer w0.254: v1(60.74,46.89) 64.67,46.89 65.94,45.62 65.94,44.76 68.85,41.85 74.17,41.85 75.96,43.64 ROW_1.8 ; v1@60.75,42.75 v1(60.72,42.72) RA2.4@61.77,42.72
M9: OPA2.9 RA2.3 ROW_1.7 | length 30.7
  Top Layer w0.254: OPA2.9@63.74,44.52 63.74,45.39 64.31,45.96 v1(64.31,46)
  Bottom Layer w0.254: RA2.3@61.8,41.95 59.8,41.95 58.78,42.97 58.78,44.88 59.9,46 v1(64.31,46) 64.31,45.28 68.24,41.35 74.66,41.35 75.95,42.64 ROW_1.7
M10: OPA3.13 RA3.4 ROW_1.12 | length 18.4
  Top Layer w0.254: v1@68.87,49.36 v1(68.89,49.38) 68.89,49.84 69.31,50.26 OPA3.13@69.31,51.18 ; v1(68.98,53.46) 68.98,52.7 69.31,52.37 OPA3.13
  Bottom Layer w0.254: v1@68.92,49.41 v1(68.89,49.38) RA3.4@69.94,49.38 ; v1(68.98,53.46) 72.79,53.46 73.8,52.45 73.8,48.23 74.39,47.64 ROW_1.12
M11: OPA3.9 RA3.3 ROW_1.11 | length 24.5
  Top Layer w0.254: OPA3.9@71.91,51.18 71.91,52.05 72.48,52.62 v1(72.48,52.66)
  Bottom Layer w0.254: RA3.3@69.97,48.61 67.97,48.61 66.95,49.63 66.95,51.54 68.07,52.66 v1(72.48,52.66) 72.48,50.24 73.29,49.43 73.29,47.71 74.36,46.64 ROW_1.11
M12: OPA3.6 RA3.2 ROW_1.10 | length 18.8
  Top Layer w0.254: OPA3.6@71.91,45.28 71.91,44.44 v1(72.55,43.8)
  Bottom Layer w0.254: RA3.2@69.97,47.81 68.08,47.81 67.13,46.86 67.13,44.74 67.63,44.24 72.11,44.24 v1(72.55,43.8) 72.55,44.98 73.21,45.64 ROW_1.10
M13: OPA5.2 RA5.1 ROW_1.19 | length 17.5
  Top Layer w0.254: v1(68.51,57.63) 68.51,57.72 68.72,57.93 69.365,58.575 OPA5.2 ; v1(68.86,61.25) 69.38,60.73 OPA5.2@69.38,59.58
  Bottom Layer w0.254: v1(68.51,57.63) 68.51,56.99 68.72,56.78 69.21,56.29 74.27,56.29 75.92,54.64 ROW_1.19 ; v1(68.86,61.25) RA5.1@69.98,61.25
M14: OPA4.9 RA4.3 ROW_1.17 | length 30.3
  Top Layer w0.254: OPA4.9@63.71,57.09 63.71,57.96 64.28,58.53 v1(64.28,58.57)
  Bottom Layer w0.254: RA4.3@61.77,54.52 59.77,54.52 58.75,55.54 58.75,57.45 59.44,58.14 62.84,58.14 63.27,58.57 v1(64.28,58.57) 65.23,58.57 68.55,55.25 73.46,55.25 76.07,52.64 ROW_1.17
M15: OPA4.2 RA4.1 ROW_1.15 | length 28.3
  Top Layer w0.254: v1(60.59,52.86) 61.11,52.34 OPA4.2@61.11,51.19 ; v1(60.89,48.87) 60.89,49.91 61.115,50.135 OPA4.2
  Bottom Layer w0.254: v1(60.59,52.86) RA4.1@61.71,52.86 ; v1(60.89,48.87) 64.6,48.87 66.37,50.64 66.37,51.95 68.59,54.17 72.81,54.17 74.32,52.66 74.32,52.25 75.93,50.64 ROW_1.15
M16: OPA4.6 RA4.2 ROW_1.16 | length 29.5
  Top Layer w0.254: OPA4.6@63.71,51.19 63.71,50.35 v1(64.35,49.71)
  Bottom Layer w0.254: RA4.2@61.77,53.72 59.88,53.72 58.93,52.77 58.93,50.65 59.87,49.71 v1(64.35,49.71) 64.35,50.71 68.37,54.73 73.12,54.73 76.21,51.64 ROW_1.16
M17: OPA4.13 RA4.4 ROW_1.18 | length 23.6
  Top Layer w0.254: v1@60.67,55.27 v1(60.69,55.29) 61.11,55.71 OPA4.13@61.11,57.09 ; OPA4.13 v1(61.115,58.995)
  Bottom Layer w0.254: v1@60.72,55.32 v1(60.69,55.29) RA4.4@61.74,55.29 ; v1(61.115,58.995) 62.375,58.995 62.99,59.61 65.01,59.61 68.84,55.78 73.82,55.78 75.96,53.64 ROW_1.18
M18: OPA5.6 RA5.2 ROW_1.20 | length 18.8
  Top Layer w0.254: OPA5.6@71.98,59.58 71.98,58.74 v1(72.62,58.1)
  Bottom Layer w0.254: RA5.2@70.04,62.11 68.15,62.11 67.2,61.16 67.2,59.04 67.6,58.64 72.08,58.64 v1(72.62,58.1) 75.42,58.1 77.02,56.5 ROW_1.20
M19: OPA6.2 RA6.1 ROW_2.6 | length 13.9
  Top Layer w0.254: v1(63.37,67.68) 63.38,67.68 63.61,67.91 OPA6.2 68.37,67.91 69.71,69.25 ROW_2.6
  Bottom Layer w0.254: RA6.1 63.29,67.76 v1(63.37,67.68)
M20: OPA5.13 RA5.4 ROW_2.4 | length 11.8
  Top Layer w0.254: v1@68.94,63.66 v1(68.96,63.68) 69.38,64.1 OPA5.13@69.38,65.48 ; OPA5.13 69.365,67.055 70.58,68.27 73.73,68.27 74.75,67.25 ROW_2.4
  Bottom Layer w0.254: v1@68.99,63.71 v1(68.96,63.68) RA5.4@70.01,63.68
M21: OPA5.9 RA5.3 ROW_2.2 | length 17.1
  Top Layer w0.254: OPA5.9@71.98,65.48 71.98,66.7 72.24,66.96 v1(72.55,66.96) 72.98,66.96 74.69,65.25 ROW_2.2
  Bottom Layer w0.254: RA5.3@70.04,62.91 68.04,62.91 67.02,63.93 67.02,66.01 67.97,66.96 v1(72.55,66.96)
NetADC1_36: ADC1.36 C5.1 | length 2
  Top Layer w0.254: ADC1.36@46.305,30.12 46.305,29.015 46.7,28.62 C5.1@46.7,28.32
NetADC1_39: ADC1.39 C6.1 | length 1.9
  Top Layer w0.254: C6.1@47.83,28.275 ADC1.39@47.83,30.125
NetADC1_42: ADC1.42 C3.2 | length 1.9
  Top Layer w0.254: C3.2@49.33,28.255 ADC1.42@49.33,30.125
NetADC1_44: ADC1.44 ADC1.45 C4.1 | length 2.4
  Top Layer w0.254: ADC1.44@50.33,30.125 50.83,30.125 C4.1@50.83,28.255
NetADC2_36: ADC2.36 C13.1 | length 2.1
  Top Layer w0.254: ADC2.36@46.365,46.53 46.365,45.18 C13.1
NetADC2_39: ADC2.39 C14.1 | length 2
  Top Layer w0.254: ADC2.39@47.89,46.535 47.89,45.42 48.16,45.15 C14.1
NetADC2_42: ADC2.42 C11.2 | length 1.9
  Top Layer w0.254: C11.2@49.39,44.665 ADC2.42@49.39,46.535
NetADC2_44: ADC2.44 ADC2.45 C12.1 | length 2.4
  Top Layer w0.254: ADC2.44@50.39,46.535 50.89,46.535 C12.1@50.89,44.665
NetADC3_36: ADC3.36 C21.1 | length 2
  Top Layer w0.254: ADC3.36@46.39,63.06 46.39,61.93 46.7,61.62 C21.1
NetADC3_39: ADC3.39 C22.1 | length 1.9
  Top Layer w0.254: C22.1@47.915,61.215 ADC3.39@47.915,63.065
NetADC3_42: ADC3.42 C19.2 | length 1.9
  Top Layer w0.254: C19.2@49.415,61.195 ADC3.42@49.415,63.065
NetADC3_44: ADC3.44 ADC3.45 C20.1 | length 2.4
  Top Layer w0.254: ADC3.44@50.415,63.065 50.915,63.065 C20.1@50.915,61.195
OS0: ADC1.3 ADC2.3 ADC3.3 IOEX.27 | length 58.6
  Top Layer w0.254: v1(51.31,38.43) ADC1.3 ; v1(51.37,54.84) ADC2.3@51.37,57.735 ; v1(51.395,71.37) ADC3.3@51.395,74.265 ; v1(62.07,72.66) 62.2,72.79 IOEX.27
  Bottom Layer w0.254: v1(51.31,38.43) v1@51.31,71.285 ; v1(51.395,71.37) 57.14,71.37 58.43,72.66 v1(62.07,72.66)
OS1: ADC1.4 ADC2.4 ADC3.4 IOEX.26 | length 57.7
  Top Layer w0.254: v1(50.33,39.27) 50.42,39.27 50.81,39.66 ADC1.4 ; v1(50.42,55.65) 50.45,55.65 50.87,56.07 ADC2.4@50.87,57.735 ; v1(50.445,72.18) 50.475,72.18 50.895,72.6 ADC3.4@50.895,74.265 ; v1(57.92,73.44) IOEX.26
  Bottom Layer w0.254: v1@50.445,39.385 v1(50.445,72.18) 51.535,73.27 51.705,73.44 v1(57.92,73.44)
OS2: ADC1.5 ADC2.5 ADC3.5 IOEX.25 | length 63
  Top Layer w0.254: v1@49.32,38.64 v1(49.32,38.66) 49.32,39.41 50.31,40.4 ADC1.5 ; v1(49.38,55.07) 49.38,55.82 50.37,56.81 ADC2.5@50.37,57.735 ; v1@49.405,71.58 v1(49.405,71.6) 49.405,72.35 50.395,73.34 ADC3.5@50.395,74.265 ; v1(57.29,75.2) 58.39,74.1 IOEX.25@67.905,74.1
  Bottom Layer w0.254: v1(49.32,38.66) v1@49.32,71.515 ; v1(49.405,71.6) 49.405,72.27 52.355,75.22 52.375,75.2 v1(57.29,75.2)
OUT1_0: ADC1.28 PI0W.33 | length 9.7
  Top Layer w0.254: PI0W.33 35.055,33.975 ADC1.28
OUT1_1: ADC1.29 PI0W.36 | length 7
  Top Layer w0.254: PI0W.36 37.61,32.73 38.355,33.475 ADC1.29
OUT1_2: ADC1.30 PI0W.35 | length 10.3
  Top Layer w0.254: PI0W.35 35.01,31.48 37.53,31.48 39.025,32.975 ADC1.30
OUT1_3: ADC1.31 PI0W.38 | length 7.6
  Top Layer w0.254: PI0W.38 37.48,30.19 39.765,32.475 ADC1.31
OUT1_4: ADC1.32 PI0W.37 | length 11.1
  Top Layer w0.254: PI0W.37 35.11,28.84 37.55,28.84 40.685,31.975 ADC1.32
OUT1_5: ADC1.33 PI0W.40 | length 10.4
  Top Layer w0.254: PI0W.40 37.51,27.65 40.81,30.95 44.31,30.95 44.81,30.45 ADC1.33
OUT2_0: ADC2.28 PI0W.15 | length 13.9
  Top Layer w0.254: PI0W.15 34.98,56.91 37.2,56.91 38.66,55.45 38.66,53.08 41.35,50.39 ADC2.28
OUT2_1: ADC2.29 PI0W.18 | length 10.6
  Top Layer w0.254: PI0W.18@36,55.59 37.01,55.59 37.89,54.71 37.89,52.58 40.58,49.89 ADC2.29
OUT2_2: ADC2.30 PI0W.19 | length 10.8
  Top Layer w0.254: PI0W.19 34.93,51.88 37.4,51.88 39.89,49.39 ADC2.30
OUT2_3: ADC2.31 PI0W.22 | length 7.4
  Top Layer w0.254: PI0W.22 37.49,50.51 39.11,48.89 ADC2.31
OUT2_4: ADC2.32 PI0W.21 | length 10.1
  Top Layer w0.254: PI0W.21 34.99,49.28 37.58,49.28 38.47,48.39 ADC2.32
OUT2_5: ADC2.33 PI0W.23 | length 11.7
  Top Layer w0.254: PI0W.23 34.93,46.8 38.1,46.8 38.36,46.54 ADC2.33
OUT3_0: ADC3.28 PI0W.8 | length 7.3
  Top Layer w0.254: PI0W.8 37.59,68.29 38.955,66.925 ADC3.28
OUT3_1: ADC3.29 PI0W.7 | length 10.1
  Top Layer w0.254: PI0W.7 35.08,66.97 37.71,66.97 38.255,66.425 ADC3.29
OUT3_2: ADC3.30 PI0W.10 | length 6.8
  Top Layer w0.254: PI0W.10 38.05,65.75 38.225,65.925 ADC3.30
OUT3_3: ADC3.31 PI0W.12 | length 7.7
  Top Layer w0.254: PI0W.12 39.5,63.21 41.715,65.425 ADC3.31
OUT3_4: ADC3.32 PI0W.11 | length 11.1
  Top Layer w0.254: PI0W.11 35.06,61.91 39.09,61.91 42.105,64.925 ADC3.32
OUT3_5: ADC3.33 PI0W.13 | length 13.2
  Top Layer w0.254: PI0W.13 35.09,59.34 38.76,59.34 42.495,63.075 ADC3.33
R\D\\: ADC1.12 ADC2.12 ADC3.12 PI0W.29 | length 53.1
  Top Layer w0.254: v1(46.35,42.81) 46.37,42.81 46.81,42.37 ADC1.12 ; v1(46.41,59.22) 46.43,59.22 46.87,58.78 ADC2.12@46.87,57.735 ; v1(46.435,75.75) 46.455,75.75 46.895,75.31 ADC3.12@46.895,74.265
  Bottom Layer w0.254: PI0W.29@33.61,40.2 33.9,40.2 34.95,39.15 38.44,39.15 39.01,38.58 42.12,38.58 v1(46.35,42.81) v1@46.35,75.665
S1: IOEX.17 SPDT1.1 | length 16.9
  Top Layer w0.254: IOEX.17 71.215,77.205 71.75,77.74 v1@76.45,77.74
  Bottom Layer w0.254: v1(76.45,77.73) 78.61,77.73 79.74,78.86 79.74,83.94 78.92,84.76 SPDT1.1
S2: IOEX.18 SPDT1.10 | length 10
  Top Layer w0.254: v1(70.525,75.53) 70.565,75.57 IOEX.18
  Bottom Layer w0.254: v1(70.525,75.53) 72.85,75.53 76.23,78.91 SPDT1.10
S3: IOEX.19 SPDT1.11 | length 4.2
  Top Layer w0.254: IOEX.19@69.905,76.75 v1(69.905,77.84)
  Bottom Layer w0.254: v1(69.905,77.84) 71.735,77.84 72.345,78.45 SPDT1.11
S4: IOEX.20 SPDT1.20 | length 29.5
  Top Layer w0.254: v1@69.265,75.61 IOEX.20
  Bottom Layer w0.254: v1(69.205,75.55) 70.255,74.5 73.04,74.5 75.41,76.87 78.81,76.87 80.49,78.55 80.49,84.18 79.11,85.56 72.715,85.56 72.345,85.19 SPDT1.20
S5: IOEX.21 SPDT2.1 | length 25.1
  Top Layer w0.254: v1(64.62,77.56) 68.275,77.56 68.285,77.57 68.615,77.24 IOEX.21
  Bottom Layer w0.254: v1(64.62,77.56) 62.02,77.56 60.03,79.55 60.03,83.775 62.005,85.75 68.835,85.75 69.37,85.215 SPDT2.1
S6: IOEX.22 SPDT2.10 | length 4.1
  Top Layer w0.254: v1(67.47,76.69) 67.47,76.085 67.515,76.04 IOEX.22
  Bottom Layer w0.254: v1(67.47,76.69) 69.37,78.59 SPDT2.10
S7: IOEX.23 SPDT2.11 | length 7.6
  Top Layer w0.254: v1(62.935,78.59) 62.935,78.075 65.62,75.39 IOEX.23
  Bottom Layer w0.254: v1(62.935,78.59) 63.23,78.885 SPDT2.11
S8: IOEX.24 SPDT2.20 | length 16.2
  Top Layer w0.254: v1(62.585,84.72) 62,84.72 61.65,84.37 61.65,78.145 65.055,74.74 IOEX.24
  Bottom Layer w0.254: v1(62.585,84.72) v1@62.585,84.735 ; v1@62.6,84.735 SPDT2.20
SCL_MCP: IOEX.8 PI0W.5 | length 77.9
  Top Layer w0.254: PI0W.5 33.05,70.83 31.96,71.92 31.96,81.35 36.88,86.27 75.86,86.27 79.66,82.47 79.66,75.38 76.42,72.14 IOEX.8
SDA_MCP: IOEX.9 PI0W.3 | length 72.3
  Top Layer w0.254: PI0W.3 33.02,73.37 32.48,73.91 32.48,80.93 37.32,85.77 75.62,85.77 79.12,82.27 79.12,75.67 76.24,72.79 IOEX.9
SEL0: IOEX.2 ROW_2.5 | length 12.5
  Top Layer w0.254: v1(69.17,70) 69.17,70.81 69.265,70.905 IOEX.2 ; v1(79.05,68.97) 79.06,68.96 ROW_2.5
  Bottom Layer w0.254: v1(69.17,70) 78.02,70 v1(79.05,68.97)
SEL1: IOEX.4 ROW_2.7 | length 12.6
  Top Layer w0.254: v1(70.13,72.64) 70.565,72.205 IOEX.4 ; v1(79.02,72.04) 79.06,72 ROW_2.7
  Bottom Layer w0.254: v1(70.13,72.64) 70.52,73.03 78.03,73.03 v1(79.02,72.04)
SEL2: IOEX.3 ROW_2.8 | length 7.3
  Top Layer w0.254: IOEX.3 69.915,70.565 70.46,70.02 73.06,70.02 74.29,71.25 ROW_2.8
VCC: BAT.2 C25.2 C26.2 C27.2 LDO1.1 LDO1.4 LDO2.1 LDO2.4 REF.1 | length 33.8
  Top Layer w0.5: BAT.2 37.002,80.42 39.307,78.115 LDO1.1 C26.2 ; LDO1.4 v1(45.085,79.65) ; C25.2@49.72,84.57 50.57,84.57 ; v1(50.55,84.9) 50.55,84.59 50.57,84.57 ; REF.1 50.57,84.57
  Bottom Layer w0.5: BAT.2 36.505,80.42 38.81,78.115 LDO2.4 ; C27.2@40.585,76.315 LDO2.4 ; LDO2.1 45.085,78.99 ; v1(50.55,84.9) 50.335,84.9 v1(45.085,79.65) 45.085,78.99 ; LDO2.4 40.585,79.165 41.11,79.69 44.385,79.69 45.085,78.99
VCOM: C30.2 OPA1.3 OPA1.5 OPA1.10 OPA1.12 OPA2.3 OPA2.5 OPA2.10 OPA2.12 OPA3.3 OPA3.5 OPA3.10 OPA3.12 OPA4.3 OPA4.5 OPA4.10 OPA4.12 OPA5.3 OPA5.5 OPA5.10 OPA5.12 OPA6.3 OPA6.5 OPA6.10 OPA6.12 REF.2 SPDT1.4 SPDT1.7 SPDT1.14 SPDT1.17 SPDT2.4 SPDT2.7 SPDT2.14 SPDT2.17 | length 181.6
  Top Layer w0.254: C30.2 REF.2 52.2,83.27 52.62,82.85 v1(60.92,82.85) ; OPA6.12 61.99,68.56 ; OPA6.10 OPA6.5 65.94,69.86 v1(67.03,70.95) ; v1(59.27,47.88) 59.29,47.9 61.79,47.9 ; OPA4.3@61.76,51.19 OPA4.12@61.76,57.09 ; OPA2.3@61.79,38.62 OPA2.3 OPA2.12@61.79,44.52 ; OPA2.12 61.79,47.9 ; OPA4.3@61.79,51.16 61.79,47.9 ; 61.8,54.17 63.06,54.17 ; 61.83,41.6 63.09,41.6 ; v1(61.93,67.04) 61.99,67.1 61.99,68.56 ; 61.99,69.85 61.99,68.56 ; OPA4.5@63.06,51.19 63.06,54.17 ; OPA4.10@63.06,57.09 63.06,54.17 ; OPA2.5@63.09,38.62 63.09,41.6 ; OPA2.10@63.09,44.52 63.09,41.6 ; OPA6.3 61.99,68.56 ; v1(66.35,49.07) 67.75,49.07 68.56,48.26 69.96,48.26 ; v1(67.23,62.56) 70.03,62.56 ; OPA1.3 OPA1.12 ; OPA1.12@69.96,37.56 OPA3.3 ; OPA3.3@69.96,45.28 69.96,48.26 ; OPA3.12@69.96,51.18 69.96,48.26 ; 69.97,34.61 71.23,34.61 ; OPA3.12@70.015,51.315 OPA5.3 ; OPA5.3@70.03,59.58 70.03,62.56 ; OPA5.12@70.03,65.48 70.03,62.56 ; OPA1.5 71.23,34.61 ; OPA1.10 71.23,34.61 ; OPA3.5@71.26,45.28 71.26,48.26 ; OPA3.10@71.26,51.18 71.26,48.26 ; OPA5.5@71.33,59.58 71.33,62.56 ; OPA5.10@71.33,65.48 71.33,62.56 ; 69.96,48.26 71.26,48.26 ; 70.03,62.56 71.33,62.56
  Bottom Layer w0.254: v1@59.4,48.01 v1(59.27,47.88) 61.54,47.88 61.92,48.26 64.9,48.26 65.71,49.07 v1(66.35,49.07) ; v1(60.92,82.85) 60.985,82.785 SPDT2.17 65.065,82.785 66.605,81.245 66.605,71.375 v1(67.03,70.95) ; v1(61.93,67.04) 61.93,65.45 64.82,62.56 v1(67.23,62.56) ; SPDT2.14 SPDT2.7 70.845,80.835 ; SPDT2.4 70.845,82.785 ; SPDT1.14@72.32,80.835 70.845,80.835 ; SPDT1.17@72.32,82.785 70.845,82.785 ; SPDT1.14 SPDT1.7 78.92,80.86 79.095,81.035 79.095,82.61 78.895,82.81 SPDT1.4 ; 70.845,80.835 70.845,82.785
pads on no net: ADC1.16 ADC1.17 ADC1.18 ADC1.19 ADC1.20 ADC1.21 ADC1.22 ADC1.24 ADC1.25 ADC1.27 ADC2.14 ADC2.15 ADC2.16 ADC2.17 ADC2.18 ADC2.19 ADC2.20 ADC2.21 ADC2.22 ADC2.24 ADC2.25 ADC2.27 ADC3.14 ADC3.15 ADC3.16 ADC3.17 ADC3.18 ADC3.19 ADC3.20 ADC3.21 ADC3.22 ADC3.24 ADC3.25 ADC3.27 IOEX.1 IOEX.7 IOEX.10 IOEX.15 IOEX.16 IOEX.28 LDO1.2 LDO2.2 OPA6.6 OPA6.7 OPA6.8 OPA6.9 OPA6.13 OPA6.14 PI0W.1 PI0W.2 PI0W.4 PI0W.16 PI0W.17 PI0W.24 PI0W.27 PI0W.28 RA6.2 RA6.3 RA6.4 RA6.5 RA6.6 RA6.7 ROW_1.13 ROW_1.14 SPDT1.15 SPDT2.15

## Polygon pours and split planes (outlines as drawn)
GND on Top Layer "TOP_GND" (solid, remove dead copper, pour order 2): 81.29,84.06 81.29,28.63 78.06,25.4 33.35,25.4 31.19,27.56 31.19,82.96 35.01,86.78 78.57,86.78
GND on Bottom Layer "BOTTOM_GND" (solid, remove dead copper, pour order 4): 35.03,86.78 78.61,86.78 81.29,84.1 81.29,28.63 78.06,25.4 33.38,25.4 31.19,27.59 31.19,82.94

## Keep-outs
Keep-Out Layer:
  lines w0.254: 31.16,27.58 ccw(c33.27,27.58) 33.27,25.47 78.19,25.47 ccw(c78.19,28.64) 81.36,28.64 81.36,84.05 ccw(c78.59,84.05) 78.59,86.82 31.89,86.82 ccw(c31.89,86.09) 31.16,86.09 31.16,27.58

## Silkscreen, mask and mechanical layers (free items; w line width, h text height)
Bottom Overlay:
  text "SINAPSE" at 53.24,66.76 h2
  text "Tactile Glove" at 56.3,50.56 h1.52
  text "Inderjot" at 50.1,31.95 h1.52
  text "Sameer" at 64.91,31.76 h1.52

## Dimensions
31.374,86.606 to 31.19,25.146 on Top Overlay
31.19,25.4 to 81.29,25.4 on Top Overlay